# EAGLE board liion s2 2x2A v1.9 (EAGLE 7.6.0)
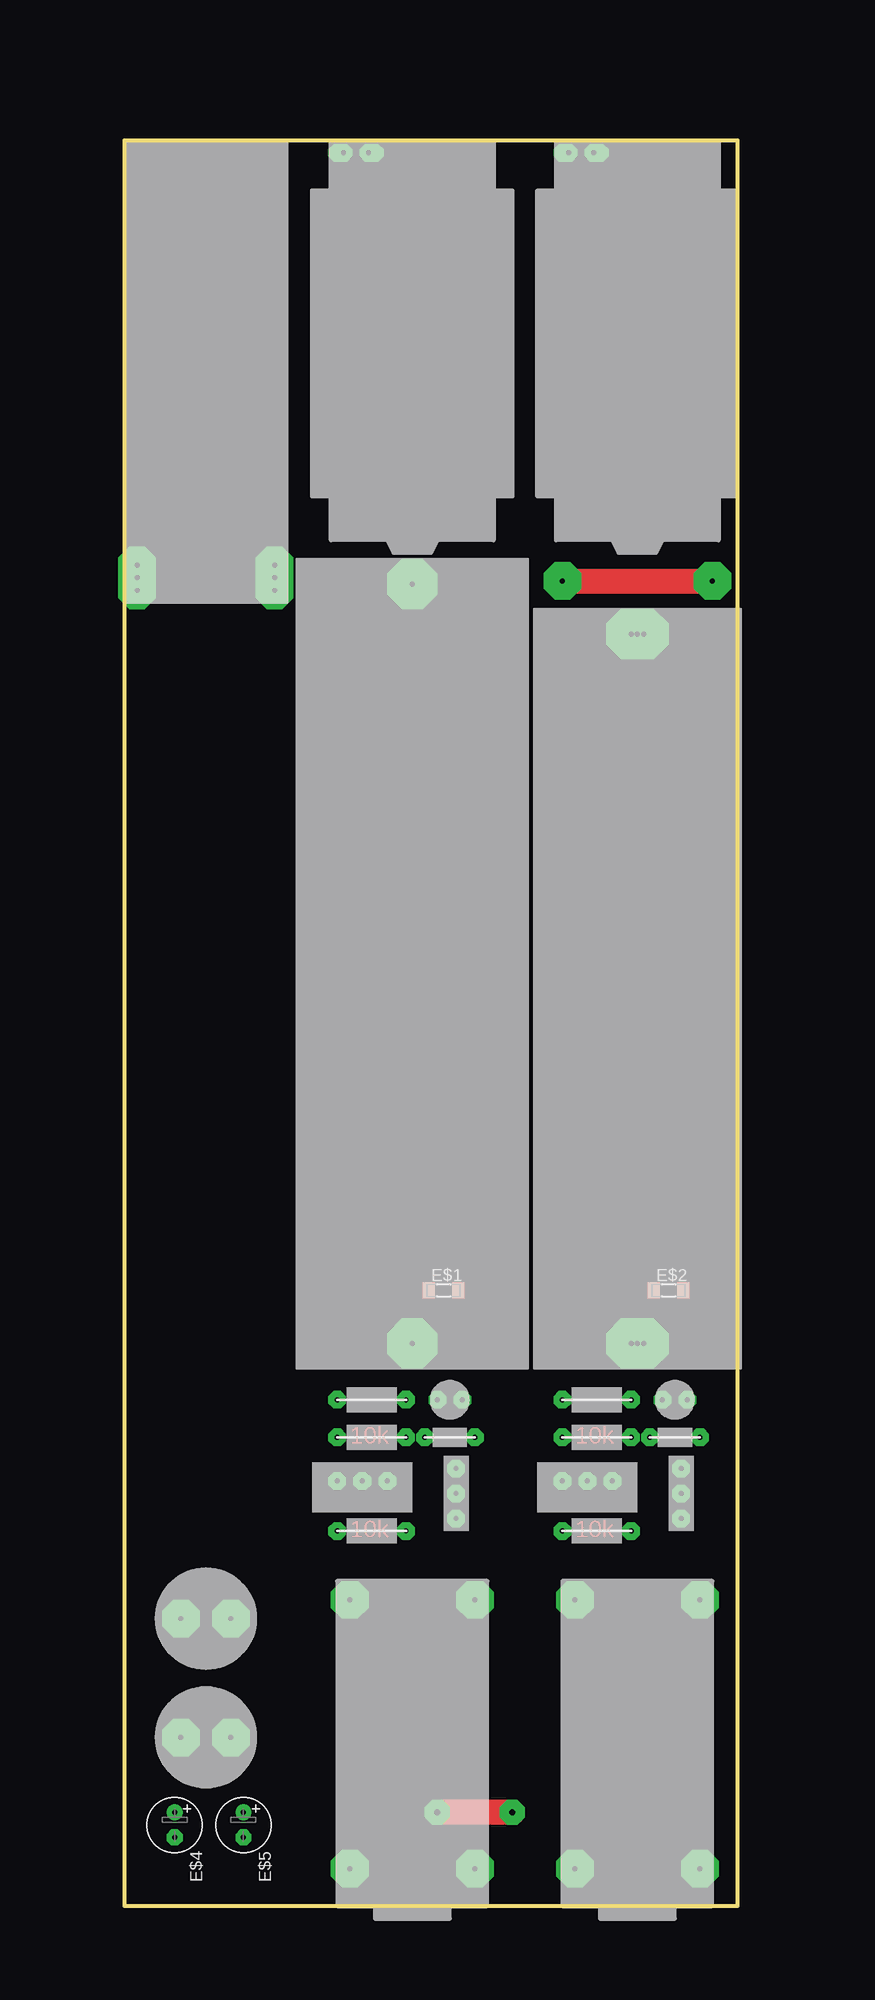
[diagram p0: board, top side]
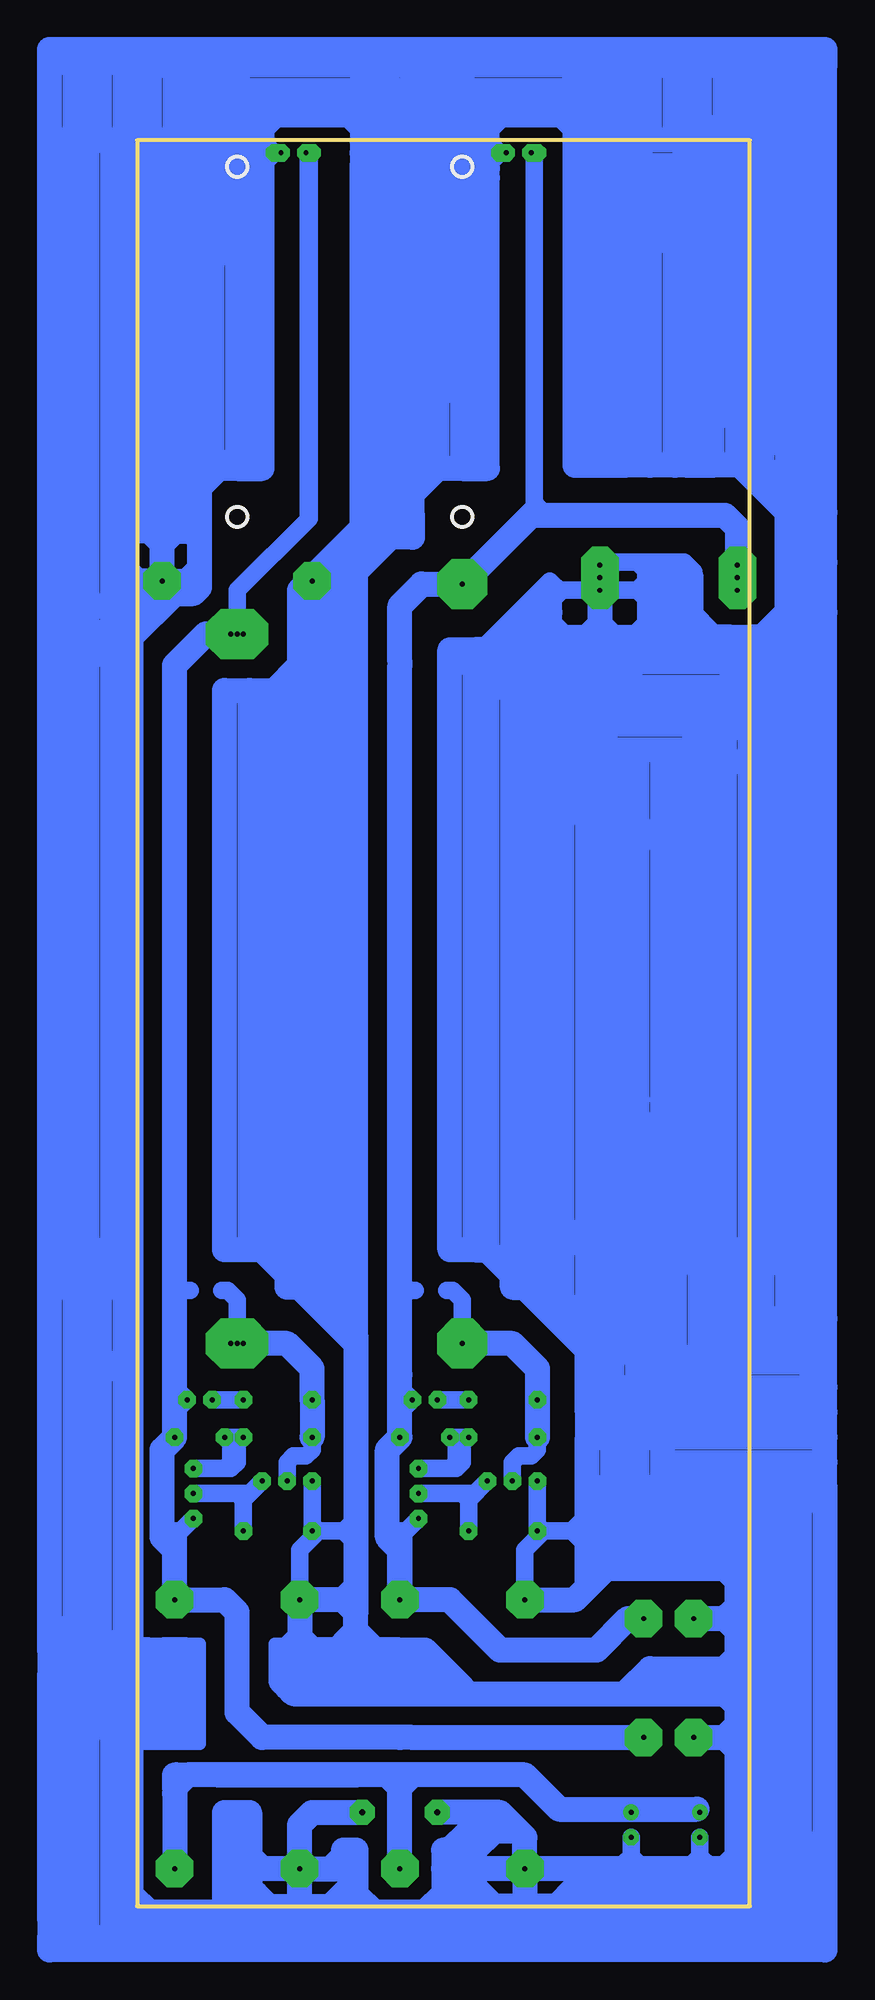
[diagram p1: board, bottom side, seen from below]

Size 62.23 x 179.39 mm. Coordinates in mm from the lower left corner, seen from the top.
Outline: 62.23,0 0,0 0,179.39 62.23,179.39 62.23,0
Copper layers (1*16): Top 0.035mm / dielectric 1.5mm / Bottom 0.035mm
Design rules "default": minimum track width 10mil, minimum drill 24mil, track to track 8mil, track to pad 8mil, pad to pad 8mil, via to via 8mil, smd to smd 8mil, copper to edge 40mil, drill to drill 8mil, minimum pad ring 10mil, minimum via ring 8mil, stop-mask expansion 4mil, vias tented up to drill 0mil, thermal gap 10mil

## Footprints (pad centres in the part's own frame; a part is rotated, then mirrored left to right if it is on the bottom)
MINI_MELF-0204W = smd 1.2 x 1.6: 1 -1.5,0; 2 1.5,0
E2,5-6 = drill 0.5 pad 1.6: + -1.27,0 | drill 0.5 pad 1.6 octagon: - 1.27,0

## Placement (x,y rotation side)
E$1  [MINI_MELF-0204W]  32.38,62.55 0 top
E$2  [MINI_MELF-0204W]  55.25,62.55 0 top
E$4  470u  [E2,5-6]  5.08,8.25 270 top
E$5  470u  [E2,5-6]  12.06,8.25 270 top

## Library data of the parts
E$1 E$2 E$4 E$5 = rcl

## Nets
S$4: E$4.-
S$7: E$5.-

## Tracks (layer width: path | path; a pad name or v marks a point on that pad's centre or on a via)
IN+1
  Bottom 2.54: 53.97,13.34 40,13.34
IN-2  (via drill 0 pad 1.78, 0.02 pad 1.78, 0.5 pad 1.78, 0.5 pad 3.81, 0.6 pad 2.54)
  Top 2.54: v39.37,9.52 v31.75,9.52 | v44.45,134.62 v59.69,134.62
  Bottom 1.27: -0.63,180.02 1.91,180.02 1.27,179.39 | v48.26,178.12 50.8,178.12 | 52.07,179.39 50.8,178.12 | 50.8,178.12 52.07,176.85 | v25.4,178.12 27.94,178.12 | 46.35,21.59 45.09,21.59 45.09,25.4 45.09,26.67 48.26,26.67 48.26,22.86 | 48.26,22.86 46.99,22.86 46.99,21.59 48.26,22.86
  Bottom 1.778: v45.72,31.11 45.72,36.2 44.45,37.46 | 41.28,38.1 40.64,37.46 40.64,38.73 41.28,38.1 | 41.28,38.1 43.81,38.1 | 43.81,38.1 44.45,37.46 | v44.45,38.1 44.45,37.46 | v44.45,38.1 43.81,38.1 | 44.45,38.73 v44.45,38.1 | 44.45,38.73 43.81,38.1 | v44.45,43.18 44.45,38.73 | v47.62,178.12 v48.26,178.12 | v48.26,178.12 48.9,178.75 48.9,177.48 v48.26,178.12 | v24.76,178.12 v25.4,178.12 | v25.4,178.12 26.03,178.75 26.03,177.48 v25.4,178.12 | 11.43,123.83 12.7,123.83 13.97,123.83 15.24,125.09 | 16.51,126.36 15.24,125.09 | 15.24,125.09 15.24,122.55 12.7,122.55 11.43,123.83 | -2.54,123.83 0,123.83 11.43,123.83 | 15.24,133.35 v15.24,133.67 | 11.43,133.67 9.84,133.67 9.84,135.89 10.48,136.53 | 11.43,136.53 10.48,136.53 | 10.48,136.53 10.16,136.53 | 7.62,136.53 7.62,135.25 8.89,136.53 | 7.62,136.53 8.89,136.53 | 8.89,136.53 10.16,136.53 | 8.89,136.53 8.89,135.25 10.16,136.53 | 10.48,134.62 10.48,135.57 | 10.48,135.57 11.43,136.53 | 7.62,136.53 6.67,136.53 5.72,135.57 | 15.24,136.53 11.43,136.53 | 10.48,135.57 10.16,135.25 10.16,134.94 11.43,133.67 | v15.24,133.67 19.05,133.67 | 19.05,133.67 19.37,133.67 | 19.37,133.67 20.32,134.62 26.99,127.95 | 19.37,133.67 20,133.03 | 20,133.03 20.32,132.72 | 13.97,128.91 10.16,128.91 8.89,130.18 8.89,131.13 11.43,133.67 | 11.43,133.67 v15.24,133.67 | 19.69,133.67 19.37,133.67 | 19.05,133.67 20,132.72 | 20,132.72 20,130.49 | 20,132.72 20,133.03 | v22.86,31.11 22.86,36.2 21.59,37.46 | v21.59,38.1 21.59,37.46 | v21.59,43.18 21.59,38.73 | 21.59,38.73 v21.59,38.1 | 16.51,32.38 16.51,38.1 18.1,38.1 | v21.59,38.1 20.96,38.1 | 20.96,38.1 18.1,38.1 | 18.1,38.1 16.83,39.37 16.83,36.83 | 16.83,36.51 16.83,36.83 | 16.83,36.83 18.1,38.1
  Bottom 1.778: 21.59,37.46 20.96,38.1 | 20.96,38.1 21.59,38.73
  Bottom 2.54: 17.78,176.85 15.24,176.85 | 12.7,176.85 1.27,176.85 | 2.54,179.39 1.27,179.39 0,179.39 0,187.01 | 2.54,179.39 5.08,179.39 | 7.62,179.39 10.16,179.39 | 12.7,179.39 15.24,179.39 | 17.78,179.39 17.78,176.85 | 17.78,176.85 17.78,152.72 | 17.15,152.08 17.78,152.72 | 0,187.01 2.54,187.01 | 5.08,187.01 7.62,187.01 | 10.16,187.01 12.7,187.01 | 15.24,187.01 17.78,187.01 | 17.78,184.47 17.78,180.66 | 17.78,180.66 17.78,179.39 | 17.78,179.39 15.24,179.39 | 15.24,179.39 15.24,187.01 | 15.24,187.01 12.7,187.01 | 12.7,187.01 12.7,179.39 | 12.7,179.39 10.16,179.39 | 10.16,179.39 10.16,187.01 | 10.16,187.01 7.62,187.01 | 7.62,187.01 7.62,179.39 | 7.62,179.39 5.08,179.39 | 5.08,179.39 5.08,187.01 | 5.08,187.01 2.54,187.01 | 2.54,187.01 2.54,179.39 | 0,187.01 -7.62,187.01 -7.62,188.28 -5.08,188.28 | 17.78,187.01 17.78,188.28 | 17.78,188.28 15.24,188.28 | 15.24,188.28 -1.27,188.28 | 39.37,140.02 39.37,176.85 | 39.37,176.85 29.21,176.85 | 35.56,174.31 36.83,174.31 36.83,140.02 38.1,140.02 38.1,175.58 30.48,175.58 29.21,174.31 30.48,174.31 | 31.75,174.31 35.56,174.31 | 35.56,174.31 35.56,141.29 | 35.56,141.29 35.56,140.02 | 29.21,173.04 34.29,173.04 34.29,143.51 | 29.21,169.23 29.21,153.99 30.48,153.99 30.48,174.31 | 29.21,169.23 31.75,169.23 31.75,174.31 | 29.21,179.39 29.21,169.23 | 30.48,174.31 31.75,174.31 | 29.21,179.39 39.37,179.39 | 39.37,179.39 39.37,178.12 | 39.37,178.12 39.37,176.85 | 29.21,179.39 29.21,180.66 | 29.21,180.66 29.21,181.93 | 29.21,181.93 29.21,188.28 31.75,188.28 | 31.75,188.28 34.29,188.28 | 36.83,188.28 39.37,188.28 39.37,179.39 | 39.37,178.12 36.83,178.12 36.83,188.28 | 36.83,188.28 34.29,188.28 | 34.29,188.28 34.29,178.12 31.75,178.12 31.75,188.28
  Bottom 2.54: 19.05,181.93 16.51,181.93 | 52.07,176.85 59.69,176.85 | 59.69,173.04 59.69,174.31 | 59.69,174.31 59.69,175.58 | 59.69,175.58 53.34,175.58 53.34,174.31 | 53.34,174.31 52.07,174.31 | 59.69,171.77 59.69,173.04 | 59.69,173.04 53.34,173.04 | 52.07,174.31 52.07,173.04 53.34,173.04 | 53.34,174.31 59.69,174.31 | 59.69,175.58 59.69,176.85 | 59.69,176.85 60.96,176.85 60.96,167.96 59.69,167.96 | 59.69,167.96 59.69,170.5 | 59.69,170.5 59.69,171.77 | 59.69,171.77 58.42,171.77 | 57.15,170.5 53.34,170.5 53.34,173.04 | 52.07,174.31 52.07,176.85 | 52.07,176.85 57.15,171.77 57.15,170.5 | 52.07,176.85 52.07,178.12 | 52.07,178.12 52.07,179.39 | 54.61,179.39 55.88,179.39 | 59.69,179.39 62.23,179.39 | 52.07,179.39 53.34,179.39 | 53.34,179.39 53.34,178.12 63.5,178.12 63.5,138.75 | 55.88,140.02 55.88,144.14 | 55.88,173.36 55.88,179.39 | 55.88,179.39 59.69,179.39 | 59.69,179.39 59.69,176.85 | 67.31,62.86 69.85,62.86 | 71.12,62.86 71.12,66.67 | 71.12,66.67 71.12,179.39 | 71.12,179.39 69.85,179.39 | 66.04,179.39 64.77,179.39 | 63.5,179.39 64.77,179.39 | 64.77,179.39 64.77,62.86 | 64.77,62.86 67.31,62.86 | 67.31,62.86 67.31,179.39 | 67.31,179.39 68.58,179.39 | 68.58,179.39 69.85,179.39 | 69.85,179.39 69.85,62.86 | 69.85,62.86 71.12,62.86 | 71.12,179.39 71.12,188.28 68.58,188.28 | 54.61,188.28 52.07,188.28 52.07,180.66 | 52.07,180.66 52.07,179.39 | 53.34,179.39 54.61,179.39 | 54.61,179.39 54.61,181.93 | 54.61,184.47 54.61,188.28 | 54.61,188.28 57.15,188.28 | 62.23,188.28 63.5,188.28 | 66.04,188.28 68.58,188.28 | 68.58,188.28 68.58,179.39 | 67.31,179.39 66.04,179.39 | 66.04,179.39 66.04,188.28 | 66.04,188.28 63.5,188.28 | 63.5,188.28 63.5,179.39 | 63.5,179.39 60.96,179.39 60.96,187.01 58.42,187.01 58.42,178.12 57.15,178.12 57.15,188.28
  Bottom 2.54: 57.15,188.28 62.23,188.28 | 62.23,188.28 62.23,187.01 | 60.96,140.02 60.96,170.5 59.69,170.5 | 59.69,167.96 59.69,141.29 57.15,141.29 57.15,170.5 | 61.59,140.02 60.96,140.02 | 55.88,140.02 60.96,140.02 | 63.5,135.89 63.5,66.67 | 63.5,62.86 64.77,62.86 | 63.5,62.86 63.5,27.3 | 63.5,27.3 63.5,24.77 | 63.5,24.77 66.04,24.77 66.04,64.13 68.58,64.13 68.58,27.3 71.12,27.3 71.12,62.86 | 71.12,66.67 63.5,66.67 | 63.5,66.67 63.5,62.86 | 60.96,26.04 60.96,20.95 | 60.96,18.41 60.96,17.14 | 60.96,17.14 59.69,17.14 | 57.15,26.04 57.15,18.41 56.51,17.78 56.51,26.04 57.15,26.04 | 57.15,26.04 58.42,26.04 | 60.96,26.04 59.69,26.04 | 59.69,26.04 59.69,17.14 | 59.69,17.14 58.42,17.14 58.42,26.04 | 58.42,26.04 59.69,26.04 | 60.96,26.04 62.23,26.04 | 62.23,23.49 62.23,17.14 | 62.23,17.14 60.96,17.14 | 62.23,17.14 63.5,17.14 | 63.5,17.14 69.22,19.68 | 71.12,19.68 71.12,20.95 | 71.12,20.95 71.12,23.49 | 71.12,26.04 71.12,28.57 62.23,26.04 | 62.23,26.04 62.23,23.49 | 62.23,23.49 71.12,26.04 | 71.12,26.04 71.12,23.49 | 71.12,23.49 60.96,20.95 | 60.96,20.95 60.96,18.41 | 60.96,18.41 71.12,20.95 | 63.5,27.3 62.23,26.04 | 29.21,181.93 40.64,181.93 | 50.8,181.93 54.61,181.93 | 54.61,181.93 54.61,184.47 | 54.61,184.47 17.78,184.47 | 17.78,184.47 17.78,187.01 | 17.78,187.01 53.34,187.01 53.34,188.28 17.78,188.28 | 15.24,188.28 15.24,180.66 | 15.24,180.66 17.78,180.66 | 17.78,180.66 19.05,181.93 | 19.05,181.93 25.4,181.93 | 25.4,181.93 27.94,181.93 | 27.94,181.93 29.21,180.66 | 29.21,180.66 39.37,180.66 40.64,181.93 | 40.64,181.93 48.26,181.93 | 48.26,181.93 50.8,181.93 | 50.8,181.93 52.07,180.66 | 53.34,8.89 53.34,9.52 50.8,9.52 50.8,5.08 | 50.8,5.08 50.8,3.81 | 50.8,3.81 51.44,3.81
  Bottom 2.54: 53.34,3.81 53.34,8.89 | 53.34,8.89 51.44,8.89 51.44,3.81 | 51.44,3.81 53.34,3.81 | 50.8,1.91 50.8,-1.91 | 50.8,-1.91 50.8,-3.81 | 50.8,-3.81 52.07,-3.81 | 52.07,-3.81 53.34,-3.81 | 53.34,-3.17 53.34,-1.27 | 53.34,-1.27 53.34,3.81 | 31.12,5.71 29.84,4.45 | 29.84,4.45 29.21,3.81 | 29.21,3.81 31.12,3.81 | 29.21,3.81 27.94,3.81 | 27.94,3.81 27.94,4.45 | 27.94,4.45 29.21,5.71 | 29.21,5.71 30.48,5.71 | 31.12,5.71 31.12,3.81 | 27.94,1.91 27.94,-3.81 | 27.94,-3.81 28.57,-3.81 | 28.57,-3.81 29.84,-3.81 | 31.12,1.27 31.12,-1.27 | 31.12,-1.27 31.12,-3.81 | 31.12,-3.81 29.84,-3.81 | 29.84,-3.81 29.84,4.45 | 50.8,-1.91 45.72,-1.91 | 43.18,-1.91 31.75,-1.91 31.12,-1.27 | 31.12,-1.27 33.66,-1.27 | 52.07,-1.27 33.66,-1.27 | 33.66,-1.27 31.12,-3.81 | 31.12,-3.81 50.8,-3.81 | 52.07,-3.81 52.07,-2.54 | 61.59,-1.27 63.5,0.63 | 63.5,0.63 63.5,1.91 | 63.5,0.63 63.5,-1.27 61.59,-1.27 | 61.59,-1.27 53.34,-1.27 | 53.34,-1.27 52.07,-2.54 | 52.07,-2.54 53.34,-3.17 | 53.34,-3.17 53.34,-3.81 | 53.34,-3.81 64.77,-3.81 | 64.77,-3.81 67.31,-3.81 | 69.22,-1.27 71.12,-1.27 | 71.12,-1.27 71.12,19.68 | 71.12,19.68 69.22,19.68 | 69.22,19.68 69.22,-1.27 | 69.22,-1.27 67.31,-3.81 | 67.31,-3.81 67.31,20.32 64.77,17.78 64.77,-3.81 | v45.72,3.81 45.72,8.25 44.45,9.52 v39.37,9.52 | v31.75,9.52 25.4,9.52 23.5,7.62 | 2.54,3.81 v22.86,3.81 | 0,3.81 0.63,3.81 | 2.54,3.81 0.63,3.81 | 2.54,3.81 1.27,5.08 | 1.27,5.08 1.27,15.88 | 1.27,15.88 1.27,18.41 | 1.27,18.41 1.27,34.29 | 0.63,3.81 0.63,6.98 0,6.98 | 0,6.35 0,3.81 | 1.27,5.08 0,6.35 | 0,6.98 0,6.35 | 0.63,34.29 1.27,34.29 | 0,41.91 0,6.98 | 0,3.81 -1.91,3.81 -3.81,6.35 -7.62,6.35 | -7.62,2.54 -7.62,0.63 | -7.62,0.63 -7.62,-1.27 | -7.62,-1.27 22.86,-3.81 | 22.86,-3.81 22.86,-1.91
  Bottom 2.54: v22.86,3.81 22.86,0 | -7.62,6.35 -7.62,2.54 | -7.62,2.54 19.69,0 | 19.69,0 22.86,0 | 22.86,0 22.86,-1.91 | 22.86,-1.91 -7.62,0.63 | 22.86,-3.81 27.94,-3.81 | 28.57,-3.81 28.57,-1.91 26.67,-1.91 | 26.67,-1.91 22.86,-1.91 | v22.86,3.81 27.94,3.81 | 31.12,3.81 31.12,1.27 | 31.12,1.27 33.02,-0.63 38.1,-0.63 | 38.1,-0.63 41.91,-0.63 | 41.91,-0.63 43.18,-0.63 | 43.18,-0.63 46.99,-0.63 | 46.99,-0.63 60.96,-0.63 62.87,1.27 | 62.87,1.27 63.5,1.91 | 63.5,1.91 63.5,17.14 | 63.5,17.14 63.5,24.77 | 63.5,135.89 63.5,138.75 | 49.53,175.58 50.8,176.85 | 52.07,178.12 50.8,176.85 | 50.8,176.85 50.8,179.39 48.26,181.93 | 29.21,181.93 27.94,181.93 | 25.4,181.93 27.94,179.39 27.94,178.12 27.94,176.85 26.67,175.58 | 17.78,152.72 17.78,146.37 15.24,146.37 | 15.24,146.37 12.7,146.37 | 6.35,146.37 3.81,146.37 | 1.27,146.37 0,146.37 -1.27,145.1 | -1.27,188.28 -1.27,147.64 | -1.27,146.37 -1.27,145.1 | -1.27,145.1 -3.81,142.56 | -6.35,187.01 -5.08,188.28 | -5.08,188.28 -3.81,187.01 -3.81,145.1 -5.08,143.83 -5.08,142.56 -1.27,146.37 | -1.27,146.37 -1.27,147.64 | -1.27,147.64 1.27,150.18 | 1.27,150.18 1.27,180.66 | 1.27,150.18 1.27,147.95 | 1.27,146.69 1.27,146.37 | 1.27,146.37 3.81,146.37 | 3.81,146.37 3.81,180.66 6.35,180.66 6.35,146.37 | 6.35,146.37 12.7,146.37 | 12.7,146.37 12.7,176.85 | 12.7,176.85 15.24,176.85 | 15.24,176.85 15.24,146.37 | 15.24,176.85 15.24,180.66 | -1.27,188.28 -5.08,188.28 | 45.72,62.86 45.72,126.05 | 50.8,123.51 48.26,123.51 | 48.26,123.51 45.72,126.05 | 45.72,126.05 45.72,133.67 39.37,140.02 | 39.37,140.02 35.56,140.02 | 35.56,140.02 41.91,133.67 41.91,59.05 | 41.91,59.05 45.09,62.23 | 45.09,62.23 45.72,62.86 | 45.72,62.86 43.18,62.86 43.18,134.94 35.56,141.29
  Bottom 2.54: 65.41,129.54 65.41,127 62.23,130.18 62.87,128.91 | 59.69,133.35 58.42,133.35 | 58.42,133.35 56.51,133.35 55.88,133.99 55.88,135.89 | 40.64,135.25 40.64,58.42 | 40.64,58.42 40,57.78 | 40,57.78 40,57.15 | 40,57.15 40,32.38 | 40,32.38 40,29.84 | 40,57.15 41.91,59.05 | 45.09,62.23 44.45,62.23 40.64,58.42 | 40,57.78 40,135.89 38.74,137.16 | 36.83,26.04 34.29,26.04 | 34.29,26.04 34.29,22.22 | 34.29,22.22 35.56,22.22 | 35.56,22.22 36.83,22.22 | 36.83,22.22 36.83,26.04 | 36.83,26.04 35.56,24.77 | 35.56,24.77 35.56,22.22 | 34.29,26.04 33.66,26.04 | 33.66,26.04 33.66,22.22 | 33.66,22.22 34.29,22.22 | 45.72,26.04 45.72,22.22 | 45.72,22.22 46.99,22.22 | 45.72,26.04 46.99,26.04 | 46.99,22.22 47.62,22.86 47.62,26.04 46.99,26.04 | 36.83,22.22 45.72,22.22 | 35.56,24.77 46.99,24.77 46.99,22.22 | 35.56,24.77 35.56,26.04 38.1,26.04 | 40,27.94 38.1,26.04 | 38.1,26.04 44.45,26.04 | 41.91,31.11 v45.72,31.11 45.72,27.3 | 45.72,27.3 44.45,26.04 | 44.45,26.04 45.72,26.04 | 46.99,26.04 45.72,27.3 | 45.72,27.3 45.72,26.04 | 45.72,26.04 45.09,25.4 42.54,25.4 40,27.94 | 40,27.94 40,29.84 | 40,29.84 41.28,31.11 40,32.38 | 45.72,0.63 45.72,-1.91 | 45.72,-1.91 43.18,-1.91 | 43.18,-1.91 43.18,-0.63 | 45.72,0.63 46.99,-0.63 | 45.72,0.63 v45.72,3.81 | 41.91,-0.63 40.64,1.91 | 42.54,3.81 40.64,5.71 | 41.28,5.71 40.64,5.71 | 40.64,5.71 40,5.71 40,1.27 38.1,-0.63 | -6.35,4.45 17.78,1.91 19.69,0 | 22.86,0 26.03,0 27.94,1.91 | 27.94,1.91 26.67,-1.91 | 27.94,1.91 27.94,3.81 | 27.94,3.81 28.57,5.71 29.21,5.71 | 27.94,4.45 27.94,5.71 26.03,7.62 | 26.03,7.62 28.57,7.62 30.48,5.71 | 30.48,5.71 31.12,5.71 | 40.64,1.91 43.18,-0.63 | v45.72,3.81 50.16,3.81 | 50.8,2.54 51.44,1.27 50.16,1.27 | 50.16,1.27 48.9,0 40.64,0
  Bottom 2.54: 62.87,128.91 62.87,56.52 | 64.77,54.61 62.87,56.52 | 62.87,56.52 62.87,1.27 | v22.86,3.81 22.86,6.98 23.5,7.62 | 23.5,7.62 26.03,7.62 | v45.72,3.81 50.8,3.81 | 50.8,3.81 50.8,2.54 | 50.8,2.54 50.8,1.91 | 50.8,1.91 50.16,1.27 | v45.72,3.81 49.53,3.81 50.8,5.08 | v45.72,3.81 42.54,3.81 | 42.54,3.81 40.64,3.81 40.64,1.91 | 62.87,128.91 58.42,133.35 | 58.42,133.35 57.15,134.62 | 62.23,134.62 62.23,133.35 61.59,132.72 v59.69,134.62 | 57.15,140.97 58.42,139.7 | v59.69,134.62 59.69,138.43 | 59.69,138.43 58.42,139.7 | 58.42,139.7 56.83,139.7 55.88,138.75 | 58.42,139.7 60.96,139.7 | 62.87,139.7 62.55,139.7 | 60.96,139.7 59.69,138.43 | v59.69,134.62 57.15,134.62 | 57.15,134.62 55.88,135.89 | 55.88,135.89 55.88,138.75 | v59.69,134.62 62.23,134.62 | 62.23,134.62 63.5,135.89 | 26.67,175.58 26.67,176.53 | 26.67,176.53 26.67,180.98 | 49.53,175.58 49.53,176.53 | 49.53,176.53 49.53,182.25 | -7.62,-1.27 -7.62,-3.17 | -7.62,-3.17 -7.62,-4.45 71.12,-4.45 71.12,-3.17 | 71.12,-1.27 71.12,-3.17 | 71.12,-3.17 -7.62,-3.17 | -3.81,142.88 1.27,147.95 | 1.27,147.95 1.27,146.69 | 1.27,146.69 -3.81,141.61 | -3.81,141.61 -4.13,141.61 | -4.13,141.61 -5.08,141.61 | -7.62,141.61 -7.62,188.6 71.12,188.6 71.12,187.32 -6.35,187.32 -6.35,142.88 | 60.96,139.7 62.55,139.7 | 62.55,139.7 63.5,138.75 | -3.81,141.61 -3.81,136.53 -7.62,136.53 | -7.62,136.53 -7.62,141.61 | -7.62,141.61 -5.08,141.61 | -5.08,141.61 -5.08,137.8 | 13.97,42.55 16.51,42.55 16.51,32.38 | 1.27,42.55 -2.54,42.55 | -5.08,42.55 -7.62,42.55 -7.62,6.35 | -5.08,6.98 -5.08,42.55 | -5.08,42.55 -2.54,42.55 | -2.54,42.55 -2.54,4.45 1.27,4.45 1.27,5.08 | 1.27,34.29 1.27,38.73 | 1.27,40.01 1.27,42.55 | 1.27,42.55 8.89,42.55
  Bottom 2.54: 8.89,42.55 8.89,41.27 -7.62,41.27 -7.62,45.09 | 8.89,42.55 13.97,42.55 | 13.97,42.55 13.97,40.01 11.43,40.01 | 35.56,140.02 34.29,141.29 | 34.29,141.29 34.29,143.51 | 34.29,143.51 31.75,146.05 | 29.21,146.05 26.67,146.05 26.67,175.58 | 26.67,176.53 29.21,173.99 29.21,146.05 | 29.21,146.05 31.75,146.05 | 31.75,146.05 31.75,175.26 | 34.29,141.29 34.29,139.06 36.83,139.06 | 55.88,138.75 55.88,140.02 | 55.88,144.14 55.88,146.05 | 55.88,146.05 54.61,146.05 | 52.07,146.05 49.53,146.05 49.53,175.58 | 49.53,176.53 52.07,176.53 52.07,146.05 | 52.07,146.05 54.61,146.05 | 54.61,146.05 54.61,173.36 55.88,173.36 | 55.88,173.36 55.88,146.05 | 55.88,144.14 53.34,146.69 | 2.22,53.02 2.22,52.7 | 2.22,52.7 -6.35,52.7 | -6.35,52.7 -7.62,52.7 | -7.62,52.7 -7.62,131.44 | -7.62,131.44 -3.81,131.44 -1.27,128.91 | -1.27,128.91 -5.08,128.91 -5.4,129.22 | -5.4,129.22 -6.35,130.18 | -5.08,59.05 -3.81,59.05 -3.81,59.69 | -5.08,59.05 -6.35,59.05 | 0,59.69 0,58.42 1.27,59.69 | 1.27,57.78 -6.35,57.78 | -1.27,67.94 -1.27,57.78 0,57.78 0,65.41 | 1.27,57.78 1.27,59.69 | 1.27,59.69 0,59.69 | -6.03,55.25 1.27,55.25 | 1.27,55.25 1.27,57.78 | -1.27,128.59 -1.59,128.91 | -1.59,128.91 -3.81,131.13 | 0,59.69 -3.81,59.69 | -3.81,59.69 -7.62,59.69 | -3.81,119.7 -3.81,59.69 | -3.81,119.7 -2.54,119.7 | -3.81,131.13 -3.81,119.7 | 1.27,52.7 1.27,55.25 | 1.27,59.69 1.27,66.67 2.54,66.67 | -2.54,119.7 0,119.7 | -2.54,119.7 -2.54,65.41 0,65.41 | 0,119.7 2.54,119.7 | 2.54,119.7 5.08,119.7 5.08,118.75 | 0,119.7 0,65.41 | 2.54,66.67 2.54,119.7 | 20.96,132.08 21.59,132.72 | 20.96,133.35 20.96,132.08 | 20.96,132.08 20.32,131.44 | 20.32,131.44 20.32,132.72 20.32,133.35 | 2.54,65.41 2.54,66.67 | 2.54,65.41 0,65.41
  Bottom 2.54: 5.08,118.75 5.08,80.64 | 5.08,80.64 5.08,73.03 | 5.08,73.03 5.08,65.41 | 5.08,65.41 2.54,65.41 | -2.54,128.91 -2.54,123.83 -2.54,122.55 | -2.54,122.55 -2.54,121.28 | -2.54,121.28 -2.54,116.2 8.89,116.2 8.89,109.86 | 16.51,127.64 17.78,128.91 | 16.51,109.86 16.51,59.05 | 16.51,59.05 19.05,61.59 19.05,126.36 | 5.08,65.41 7.62,65.41 | 7.62,73.03 7.62,65.41 | 19.05,126.36 19.05,127.64 21.59,130.18 21.59,131.44 25.4,127.64 | 19.05,60.33 21.59,62.86 21.59,123.83 | 19.05,126.36 20.32,125.09 | 20.32,125.09 20.32,126.36 22.86,128.91 22.86,126.36 | 7.62,65.41 10.16,65.41 10.16,73.03 | 8.89,109.86 8.89,73.03 | 8.89,73.03 7.62,73.03 | 16.51,59.05 13.97,56.52 16.51,56.52 | 16.51,52.7 15.24,52.7 | 8.89,73.03 10.16,73.03 | 20.32,125.09 21.59,123.83 | 22.86,126.36 24.13,127.64 24.13,126.36 | 21.59,123.83 22.86,122.55 | 22.86,122.55 22.86,126.36 | 10.16,73.03 10.16,75.56 22.86,62.86 | 15.24,52.7 16.51,56.52 | 22.86,62.86 16.51,56.52 | 22.86,122.55 24.13,122.55 | 24.13,122.55 24.13,126.36 | 24.13,126.36 25.4,127.64 | 22.22,131.44 26.03,127.64 | 25.4,127.64 26.03,127.64 | 24.13,122.55 24.13,64.13 | 22.86,62.86 24.13,62.86 24.13,64.13 | 26.03,127.64 26.67,127.64 | 20.32,133.99 26.67,127.64 | 27.94,127.64 29.21,126.36 | 26.67,127.64 27.94,127.64 | -6.35,130.18 -6.35,60.33 -5.08,59.05 | 16.51,109.86 15.24,108.58 13.97,108.58 | 8.89,109.86 10.16,108.58 13.97,108.58 | 13.97,108.58 13.97,55.25 | 16.51,109.86 16.51,117.47 | 16.51,117.47 16.51,120.02 | 16.51,120.02 16.51,126.36 16.51,127.64 | 17.78,128.91 16.51,128.91 | 16.51,128.91 16.51,127.64 | -1.27,128.91 -1.27,128.59 | -0.95,128.27 -1.27,128.59 | -2.54,122.55 16.51,122.55 17.78,121.28 15.24,121.28
  Bottom 2.54: -2.54,121.28 15.24,121.28 | 15.24,121.28 16.51,120.02 | 16.51,120.02 13.97,120.02 | 5.08,120.02 13.97,120.02 | 13.97,120.02 15.24,118.75 | 15.24,118.75 16.51,117.47 | 16.51,117.47 11.43,117.47 | 11.43,117.47 6.35,117.47 | 6.35,117.47 5.08,118.75 | 6.35,117.47 7.62,116.2 7.62,73.03 | 7.62,73.03 11.43,76.84 | 11.43,76.84 11.43,81.91 | 11.43,81.91 11.43,117.47 | 11.43,117.47 13.97,114.94 13.97,108.58 | 13.97,108.58 15.24,109.86 15.24,118.75 | 16.51,128.91 14.6,128.91 | 14.6,128.91 11.75,126.05 | 2.22,128.59 2.54,128.27 1.59,128.27 | 2.22,128.59 -1.59,128.59 -1.59,128.91 | 2.22,128.59 1.91,128.91 | 1.91,128.91 0,128.91 | -1.27,128.91 0,128.91 | 0,128.91 2.54,126.36 13.97,126.36 | 15.24,127.64 15.24,126.36 12.7,123.83 2.54,123.83 -1.27,127.64 -1.27,125.09 0,123.83 | 13.97,52.7 11.43,52.7 | 8.89,52.7 7.62,52.7 | 2.54,52.7 3.81,52.7 | 3.81,52.7 10.16,59.05 15.24,59.05 15.24,52.7 | 15.24,52.7 13.97,52.7 | 13.97,52.7 13.97,81.91 11.43,81.91 | 11.43,76.84 11.43,52.7 | 11.43,52.7 8.89,52.7 | 8.89,52.7 8.89,80.64 5.08,80.64 | 5.08,65.41 5.08,52.7 2.22,52.7 | -6.35,52.7 -6.35,66.67 3.81,66.67 3.81,52.7 | 3.81,52.7 7.62,52.7 | 7.62,52.7 7.62,65.41 | 7.62,73.03 5.08,73.03 | -7.62,50.16 -7.62,52.7 | 16.51,50.16 16.51,48.58 | 16.51,48.58 16.51,47.62 | 16.51,47.62 8.89,47.62 | -7.62,47.62 -7.62,50.16 | -7.62,50.16 8.89,50.16 | 11.43,50.16 16.51,50.16 | 16.51,50.16 16.51,52.7 | 16.51,52.7 16.51,56.52 | 1.91,128.91 11.43,128.91 | 17.78,128.91 19.05,128.91 20.32,130.18 20.32,131.44 | 13.97,128.91 11.43,128.91 | 11.43,128.91 10.16,130.18 10.16,135.89 6.67,135.89 6.03,135.25 6.03,131.13 4.13,129.22 7.3,129.22 7.3,133.99 8.89,133.99 8.89,130.18 8.89,129.22 10.48,129.22 10.48,127.64 15.24,127.64
  Bottom 2.54: v15.24,136.21 v15.24,134.94 v15.24,133.67 15.24,130.18 | 15.24,127.64 15.24,130.18 | 15.24,130.18 13.97,128.91 | 13.65,128.59 16.83,128.59 | 17.15,128.59 16.83,128.59 | 16.83,128.59 15.24,130.18 | 12.38,128.59 13.65,128.59 | 13.65,128.59 13.97,128.91 | 13.97,128.91 14.6,128.91 | -3.81,131.13 -3.81,141.29 -4.13,141.61 | -4.13,141.61 -5.4,140.33 -5.4,129.22 | -6.35,130.18 -7.62,131.44 | -7.62,131.44 -7.62,136.53 | 15.88,40.96 16.51,41.59 16.51,47.62 | 16.51,48.58 13.97,48.58 13.97,42.55 | 11.43,40.01 11.43,50.16 | 11.43,50.16 8.89,50.16 | 8.89,50.16 8.89,47.62 | 8.89,45.09 8.89,42.55 | -7.62,45.09 -7.62,47.62 | -7.62,47.62 8.89,47.62 | 8.89,47.62 8.89,45.09 | 8.89,45.09 -7.62,45.09 | v22.86,31.11 17.78,31.11 16.51,32.38 | v5.72,17.14 2.54,17.14 | 1.27,18.41 2.54,17.14 | 2.54,17.14 1.27,15.88 | 33.66,26.04 33.02,26.04 29.21,22.22 33.02,22.22 | 33.66,22.22 33.02,22.22 | 33.02,22.22 31.75,23.49 | 46.99,22.22 46.35,21.59 12.7,21.59 | 12.38,21.91 10.16,24.13 2.54,24.13 1.59,25.08 1.59,21.91 12.38,21.91 | 12.38,21.91 12.7,21.59 | 12.7,21.59 2.54,21.59 1.59,20.64 | 16.51,32.38 14.6,34.29 2.54,34.29 1.59,33.34 1.59,36.2 15.24,36.2 15.24,38.73 1.27,38.73 | 1.27,38.73 1.27,40.01 | 1.27,40.01 11.43,40.01 | 24.13,64.13 26.67,66.67 | 27.94,66.67 30.48,66.67 30.48,127.64 27.94,127.64 | 27.94,127.64 27.94,66.67 | 27.94,66.67 26.67,66.67 | 26.67,66.67 26.67,127.64 | 45.72,62.86 46.99,62.86 46.99,64.13 49.53,66.67 | 49.53,66.67 50.8,66.67 | 50.8,66.67 53.34,66.67 53.34,123.51 50.8,123.51 | 50.8,123.51 50.8,66.67 | 49.53,66.67 48.26,66.67 48.26,123.51 | 48.26,123.51 46.99,123.51 46.99,65.72
S$1
  Bottom 1.778: 10.16,133.99 8.89,133.99 | 8.89,133.99 7.62,133.99 6.35,135.25 7.62,135.25 8.89,133.99
S$2  (via drill 0.5 pad 1.78, 0.5 pad 5.08)
  Bottom 1.778: v24.13,43.18 24.13,45.09 23.5,45.72 22.22,45.72 21.59,46.35 v21.59,47.62 | v29.21,57.15 29.21,61.59 30.16,62.55 30.8,62.55
  Bottom 2.54: v21.59,47.62 v21.59,51.44 21.59,54.61 24.13,57.15 v29.21,57.15
S$3
  Bottom 2.54: 11.43,170.5 7.62,170.5 7.62,146.37 10.16,146.37 10.16,169.23 8.89,169.23
S$4
  Bottom 1.778: E$4.- 5.08,5.08 | 4.13,4.13 5.08,5.08 | 5.08,5.08 6.03,4.13
S$5  (via drill 0.5 pad 1.78)
  Bottom 1.778: v33.66,44.45 31.12,44.45 30.48,44.45 | 30.48,44.45 29.84,44.45 | 29.84,44.45 29.21,45.09 | 29.84,45.09 29.84,44.45 | 29.84,45.09 29.84,46.99 v30.48,47.62 v28.57,47.62 29.21,46.99 29.21,45.09 | 29.21,45.09 29.84,45.09 | 29.84,45.09 30.48,44.45
S$6
  Bottom 2.54: 66.04,132.08 60.96,132.08
S$7
  Bottom 1.778: E$5.- 12.06,5.08 | 11.43,4.45 12.06,5.08 | 12.06,5.08 12.7,4.45
S$8  (via drill 0.5 pad 1.78)
  Bottom 1.778: 29.21,41.91 27.94,41.91 v26.67,43.18 28.57,41.27 | 29.21,41.91 v33.66,41.91 | v28.57,38.1 28.57,41.27 | 28.57,41.27 29.21,41.91
S$10  (via drill 0.5 pad 1.78)
  Bottom 1.778: v56.51,44.45 53.97,44.45 53.34,44.45 | 53.34,44.45 52.71,44.45 | 52.71,44.45 52.07,45.09 | 52.71,45.09 52.71,44.45 | 52.71,45.09 52.71,46.99 v53.34,47.62 v51.44,47.62 52.07,46.99 52.07,45.09 | 52.07,45.09 52.71,45.09 | 52.71,45.09 53.34,44.45
S$11  (via drill 0.5 pad 5.08)
  other vias: 52.71,57.15
S$12
  Bottom 1.778: 33.97,62.55 34.61,62.55 | 34.93,62.86 34.61,62.55 | 34.61,62.55 34.93,62.23
S$13  (via drill 0.5 pad 5.08)
  other vias: 51.44,129.22
S$14
  Bottom 1.778: 6.35,133.35 6.35,134.3
S$15  (via drill 0.5 pad 3.81)
  Bottom 2.54: v35.56,3.81 35.56,12.06 | 35.56,12.06 36.83,13.34 | 36.83,13.34 57.15,13.34 | 58.42,12.06 58.42,11.43 v58.42,3.81 | 57.15,13.34 58.42,12.06 | 36.83,13.34 22.86,13.34 19.37,9.84 5.4,9.84 | 35.56,12.06 34.61,13.02 | 58.42,12.06 58.42,13.02 58.1,13.34 | 58.1,13.34 57.15,13.34 | 58.1,13.34 58.42,13.34 58.42,12.06
S$16  (via drill 0.5 pad 3.81)
  Bottom 2.54: v35.56,31.11 30.48,31.11 25.4,26.04 15.56,26.04 12.38,29.21 v10.79,29.21
S$17  (via drill 0.5 pad 3.81)
  Bottom 2.54: v5.72,29.21 2.54,29.21 | 1.59,30.16 2.54,29.21 | 2.54,29.21 0.95,27.62
S$18  (via drill 0.5 pad 1.78, 0.5 pad 5.08)
  Bottom 1.778: 53.66,62.55 53.02,62.55 52.07,61.59 v52.07,57.15 | v46.99,43.18 46.99,45.09 46.35,45.72 45.09,45.72 44.45,46.35 v44.45,47.62
  Bottom 2.54: v44.45,47.62 v44.45,51.44 44.45,54.61 46.99,57.15 v51.44,57.15 v52.07,57.15
S$19
  Bottom 2.54: 13.97,173.04 5.08,173.04
S$20
  Bottom 1.778: 56.83,62.55 57.47,62.55 | 57.78,62.86 57.47,62.55 | 57.47,62.55 58.1,61.91
S$24
  Bottom 1.27: 40,152.08 40,148.91
S$25
  Bottom 1.27: 55.88,18.41 55.88,16.51 61.59,16.51 61.59,18.41 | 61.59,18.41 61.59,26.67 55.88,26.67 55.88,18.41 | 55.88,18.41 61.59,18.41
S$26
  Bottom 1.27: 30.48,177.48 28.57,177.48 28.57,176.21
S$29  (via drill 0.5 pad 1.78)
  Bottom 1.778: 52.07,41.91 50.8,41.91 v49.53,43.18 51.44,41.27 | 52.07,41.91 v56.51,41.91 | v51.44,38.1 51.44,41.27 | 51.44,41.27 52.07,41.91
S$30
  Bottom 1.778: 8.25,128.27 9.53,127
S$31  (via drill 0.5 pad 1.78)
  Bottom 1.778: v28.57,51.44 v31.75,51.44
S$32
  Bottom 2.54: 12.7,171.77 6.35,171.77
S$33
  Bottom 2.54: 10.16,74.3 13.97,74.3
S$34  (via drill 0.5 pad 1.78)
  Bottom 1.778: v51.44,51.44 v54.61,51.44
S$35
  Bottom 2.54: 15.24,174.31 3.81,174.31
S$36
  Bottom 2.54: 54.61,167.96 52.07,167.96
S$38
  Bottom 2.54: -1.27,126.68 -1.59,127
S$40  (via drill 0.02 pad 1.78, 0.5 pad 1.78)
  Bottom 1.27: v21.59,178.12 21.91,178.12 v22.22,178.12 | 22.22,141.61 22.22,141.29
  Bottom 1.778: 21.91,178.12 21.91,142.56 | 21.27,141.92 21.91,142.56 | 21.91,142.56 21.91,141.92 22.22,141.61
S$41
  Bottom 2.54: 16.51,175.58 2.54,175.58
V1  (via drill 0.02 pad 1.78, 0.5 pad 1.78, 0.5 pad 3.81, 0.5 pad 5.08)
  Bottom 1.27: 52.07,133.67 52.07,133.99 49.53,136.21 45.09,140.65 v45.09,178.12 | v45.09,178.12 45.09,176.85 | v44.45,178.12 v45.09,178.12 | 58.42,31.75 57.78,32.38 57.78,38.1
  Bottom 1.778: v57.15,51.44 58.1,51.44 | 58.42,53.98 58.1,51.44 | 58.1,51.44 58.1,52.39 v57.15,51.44 | v57.15,51.44 57.78,50.8 | v56.51,39.37 57.78,38.1 | 57.78,38.1 58.42,37.46 58.42,36.2 | 57.78,38.1 59.69,38.1 | 44.77,177.8 44.77,140.97 52.07,133.67 v52.07,129.22
  Bottom 2.54: v52.07,129.22 v52.71,129.22 55.25,129.22 58.42,126.05 58.42,53.98 v58.42,47.62 59.69,46.35 59.69,38.1 59.69,37.46 58.42,36.2 58.42,31.75 v58.42,31.11 53.34,31.11 52.07,29.84 52.07,19.68 49.53,17.14 35.56,17.14 34.29,17.14 v10.79,17.14
V3  (via drill 0.5 pad 1.78)
  Bottom 1.27: 34.93,32.38 34.93,38.1
  Bottom 1.778: v34.29,51.44 35.24,51.44 | 35.56,53.98 35.24,51.44 | 35.24,51.44 35.24,52.39 v34.29,51.44 | v34.29,51.44 34.93,50.8 | v33.66,39.37 34.93,38.1 | 34.93,38.1 35.56,37.46 35.56,36.2 | 34.93,38.1 36.83,38.1
  Bottom 2.54: 35.56,126.05 35.56,53.98 v35.56,47.62 36.83,46.35 36.83,38.1 36.83,37.46 35.56,36.2 35.56,31.75
V4  (via drill 0.5 pad 3.81, 0.5 pad 5.08)
  Bottom 2.54: v29.21,134.3 22.22,141.29 2.54,141.29 1.27,140.02 v1.27,136.21 v1.27,134.94 v1.27,133.67 | 35.56,126.36 35.56,132.08 33.34,134.3 v29.21,134.3 | v29.21,134.3 21.91,141.61

## Text on the board
Top: 10k | 10k | 10k | 10k